# EAGLE board 2_Smart-Irrigation-System (EAGLE 9.7.0)

Size 291.32 x 101.12 mm. Coordinates in mm from the lower left corner, seen from the top.
Outline: 0,0 291.32,0 291.32,101.12 0,101.12 0,0
Copper layers (1*16): Top 0.035mm / dielectric 1.5mm / Bottom 0.035mm
Design rules "default": minimum track width 6mil, minimum drill 0.35mm, track to track 6mil, track to pad 6mil, pad to pad 6mil, via to via 6mil, smd to smd 6mil, copper to edge 40mil, drill to drill 6mil, minimum pad ring 10mil, minimum via ring 8mil, stop-mask expansion 4mil, vias tented up to drill 0mil, thermal gap 10mil

## Footprints (pad centres in the part's own frame; a part is rotated, then mirrored left to right if it is on the bottom)
LEDRD254W60D565H860B = drill 0.981 pad 1.581: 1 -1.27,0; 2 1.27,0
LEDRD254W60D565H860B_G = drill 0.981 pad 1.581: 1 -1.27,0; 2 1.27,0
MOTOR = drill 1.118 pad 3.15 octagon: + 2.54,0; - -2.54,0
PIEZO = drill 1 pad 1.6: 1 -3.5,0; 2 3.5,0
RESAD1016W63L850D250B = drill 0.83 pad 1.43: 1 -5.08,0; 2 5.08,0
HA-06-SM065 = drill 1 pad 1.676: 1 -2.54,-2.54; 2 0,2.54; 3 2.54,-2.54
SWITCH-SPDT-PTH-8.5X3.7MM = drill 1.016 pad 1.88: 1 -2.54,0; 2 0,0; 3 2.54,0
SEN-13322 = drill 1.016 long: 1 -2.54,0; 2 0,0; 3 2.54,0
ARDUINO-UNO-R3-SHIELD = drill 1.016 pad 1.88: 3.3V 24.13,-2.54; 5V 24.13,0; A0 24.13,12.7; A1 24.13,15.24; A2 24.13,17.78; A3 24.13,20.32; A4 24.13,22.86; A5 24.13,25.4; AREF -24.13,-13.97; D2 -24.13,20.32; D3 -24.13,17.78; D4 -24.13,15.24; D5 -24.13,12.7; D6 -24.13,10.16; D7 -24.13,7.62; D8 -24.13,3.81; D9 -24.13,1.27; D10 -24.13,-1.27; D11 -24.13,-3.81; D12 -24.13,-6.35; D13 -24.13,-8.89; GND@0 24.13,2.54; GND@1 24.13,5.08; GND@2 -24.13,-11.43; IOREF 24.13,-7.62; NC 24.13,-10.16; RES 24.13,-5.08; RX -24.13,25.4; SCL -24.13,-19.05; SDA -24.13,-16.51; TX -24.13,22.86; VIN 24.13,7.62
TO92 = drill 0.813 octagon: 1 -1.27,0; 2 0,1.905; 3 1.27,0
1X08 = drill 1.016 long: 1 -8.89,0; 2 -6.35,0; 3 -3.81,0; 4 -1.27,0; 5 1.27,0; 6 3.81,0; 7 6.35,0; 8 8.89,0
LCD-I2C = drill 1.016 long: 1 -19.05,-5.08; 2 -19.05,-7.62; 3 -19.05,-10.16; 4 -19.05,-12.7

## Placement (x,y rotation side)
D1  RED  [LEDRD254W60D565H860B]  171.56,61.29 0 top
D2  GREEN  [LEDRD254W60D565H860B_G]  196.96,61.29 0 top
M1  MOTOR_HDR  [MOTOR]  152.35,78.78 0 top
PIEZO1  PIEZO  [PIEZO]  120.76,63.83 0 top
R3  1k  [RESAD1016W63L850D250B]  165.21,58.75 180 top
R4  1k  [RESAD1016W63L850D250B]  190.61,58.75 180 top
RPOT3  250k  [HA-06-SM065]  127.11,38.43 0 top
S1  TOGGLE  [SWITCH-SPDT-PTH-8.5X3.7MM]  152.51,40.97 0 top
SEN1  SEN-13322  [SEN-13322]  127.62,7.62 0 top
U1  ARDUINO-UNO-R3-SHIELD  [ARDUINO-UNO-R3-SHIELD]  47.88,48.39 270 top
U2  TMP36GT9Z_TO92  [TO92]  106.79,40.97 0 top
U3  PINHD-1X08_1X08M  [1X08]  206.48,94.85 0 top
U7  LCD-16X2-I2CSUNFOUNDER-IIC  [LCD-I2C]  235.7,58.62 0 top

## Library data of the parts
D1 = Tinkercad; CATEGORY: Opto-Electronic; SUB-CATEGORY: LED; VALUE: LED_RED
D2 = Tinkercad; CATEGORY: Opto-Electronic; SUB-CATEGORY: LED; VALUE: LED_GREEN
M1 PIEZO1 R3 R4 RPOT3 S1 SEN1 U1-U3 U7 = Tinkercad

## Nets
D1_A: D1.1 R3.1
D2_A: D2.1 R4.1
U1_5V: RPOT3.3 S1.1 SEN1.1 U1.5V U2.3 U7.2
U1_A1: SEN1.3 U1.A1
U1_A2: U1.A2 U2.2
U1_A3: RPOT3.2 U1.A3
U1_D2: S1.2 U1.D2
U1_D4: M1.+ U1.D4
U1_D8: PIEZO1.1 U1.D8
U1_D12: R4.2 U1.D12
U1_D13: R3.2 U1.D13
U1_GND: D1.2 D2.2 M1.- PIEZO1.2 RPOT3.1 S1.3 SEN1.2 U1.GND@0 U1.GND@1 U1.GND@2 U2.1 U7.1
U1_SCL: U1.SCL U7.4
U1_SDA: U1.SDA U7.3

## Tracks (layer width: path | path; a pad name or v marks a point on that pad's centre or on a via)
D1_A  (1 unrouted)
D2_A  (1 unrouted)
U1_5V  (5 unrouted)
U1_A1  (1 unrouted)
U1_A2  (1 unrouted)
U1_A3  (1 unrouted)
U1_D2  (1 unrouted)
U1_D4  (1 unrouted)
U1_D8  (1 unrouted)
U1_D12  (1 unrouted)
U1_D13  (1 unrouted)
U1_GND  (11 unrouted)
U1_SCL  (1 unrouted)
U1_SDA  (1 unrouted)